# Altium PCB SmartHelmet.PcbDoc (part 2 of 2)
Units mm, origin at the board's own origin, x right, y up, seen from the top; angles counter-clockwise.
Board outline 33.86 x 37.02 mm, 6 copper layers (Top Layer, GND, SIGNAL, POWER, GND 2, Bottom Layer), stack 1.538 mm thick; 65 components, 48 nets, 312 pads, 182 vias.
Unrouted connection lines stored in the file: 104.
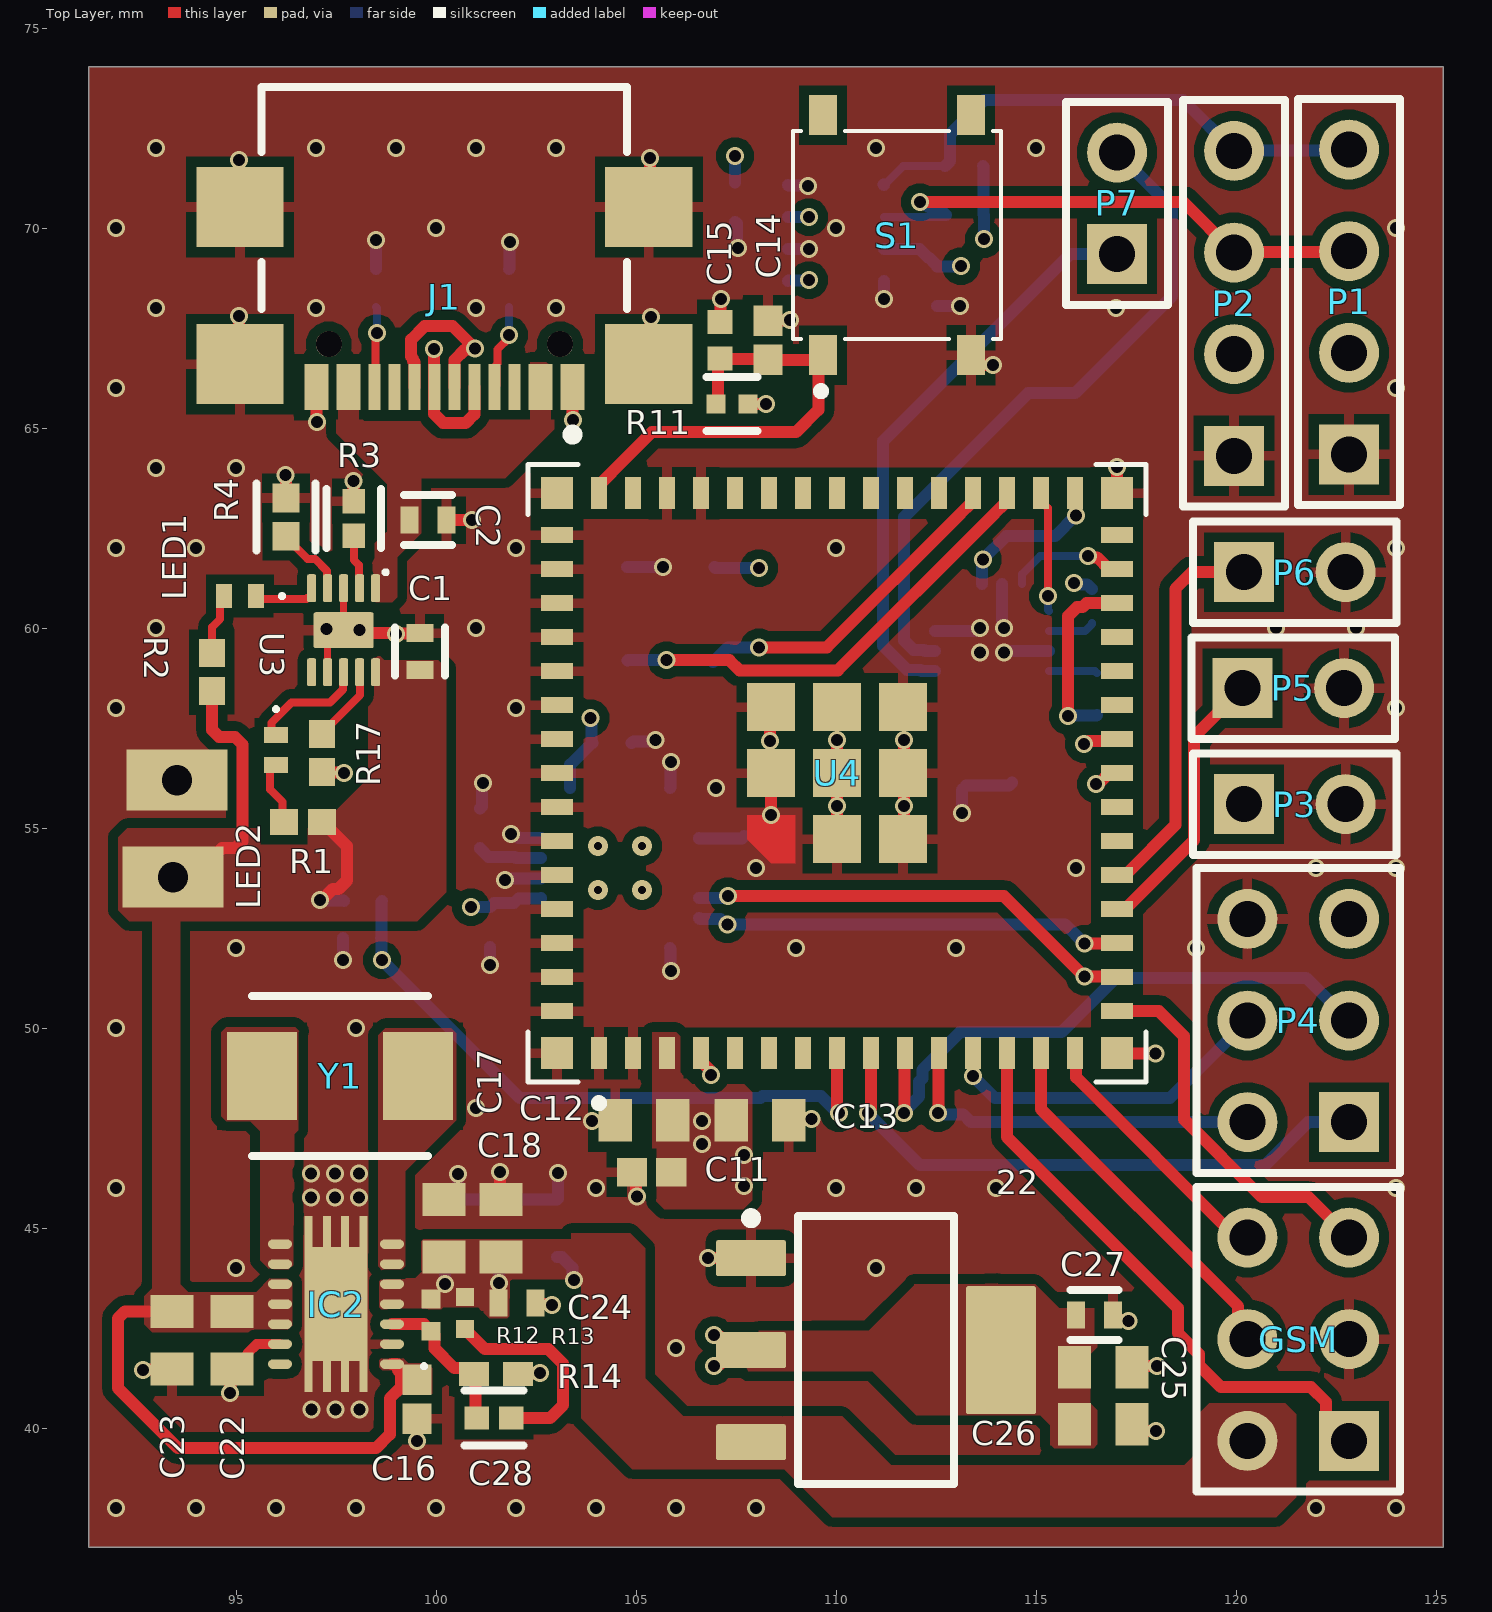
[diagram p0: Top Layer view]

## Polygon pours and split planes (outlines as drawn) (continued)
+3.3 on Top Layer "+3.3_L01_P017" (solid, pour order 17): 114.025,43.625 114.05,43.6 114.975,43.6 115.575,43 116.45,43 116.525,42.925 116.525,42.025 116.35,41.85 116.35,40.625 116.525,40.45 116.525,39.6 116.55,39.575 116.475,39.5 115.45,39.5 115.375,39.575 115.35,39.575 115.35,40.075 115.1,40.325 113.2,40.325 113.15,40.375 113.15,43.5 113.25,43.6 113.425,43.6
NetIC2_6 on Top Layer "NETIC2_6_L01_P016" (solid, pour order 16): 98.55,44.05 98.65,43.95 99.15,43.95 99.15,43.975 99.225,44.05 99.225,46.425 100.5,47.7 100.5,47.95 100.5,49.875 100.375,50 98.725,50 98.55,49.825 98.55,45.15
NetIC2_8 on Top Layer "NETIC2_8_L01_P015" (solid, pour order 15): 96.425,44.6 96.425,44.075 96.3,43.95 95.85,43.95 95.6,44.2 95.6,47.425 95.35,47.675 94.75,47.675 94.625,47.8 94.625,49.9 94.75,50.025 96.475,50.025 96.575,49.925 96.55,49.9 96.55,47.45 96.45,47.35 96.45,45.55
BAT+ on Top Layer "BAT+_L01_P013" (solid, pour order 13): 95.9,43.8 96.3,43.8 96.4,43.7 96.4,42.5 96.3,42.4 92.9,42.4 92.7,42.6 92.7,43.3 92.9,43.5 92.9,52.8 93.55,52.8 93.6,52.75 93.6,43.6 93.8,43.4 95.5,43.4
+3.3 on Top Layer "+3.3_L01_P011" (solid, pour order 11): 105.4,49.9 105.4,45.775 105.7,45.475 107.675,45.475 107.9,45.7 107.9,48.4 107.7,48.6 106.4,48.6 106.1,48.9 106.1,49.8 106,49.9 105.5,49.9
+4.2 on Bottom Layer "+4.2_L06_P027" (solid, pour order 27): 99.625,44.675 99.675,44.725 104.85,44.725 105.225,44.35 105.225,43.65 104.95,43.375 99.925,43.375 99.625,43.675
NetC3_2 on Bottom Layer "NETC3_2_L06_P010" (solid, pour order 10): 113.8,58.7 113.9,58.6 113.9,57.7 114.1,57.5 114.1,57.4 114.7,57.4 114.8,57.3 114.8,56.9 114.7,56.8 114.1,56.8 113.8,56.5 112.8,56.5 112.7,56.6 112.7,57.3 112.9,57.5 112.9,58.6 113,58.7 113.2,58.7
GND on GND "GND_L02_P021" (solid, pour order 21): 91.313,37.025 125.175,37.025 125.175,74.041 91.313,74.041
GND on GND 2 "GND_L05_P024" (solid, pour order 24): 91.313,37.025 125.175,37.025 125.175,74.041 91.313,74.041
+3.3 on POWER "+3.3_L04_P038" (solid, pour order 38): 91.313,37.025 125.175,37.025 125.175,74.041 91.313,74.041

## Silkscreen, mask and mechanical layers (free items; w line width, h text height)
Bottom Overlay:
  drawing of 2 lines, arcs and shapes, not listed
  text "Inventify" at 92.934,38.175 h3.52 r270